# Altium PCB TK513_Limiter.PcbDoc
Units mm, origin at the board's own origin, x right, y up, seen from the top; angles counter-clockwise.
Board outline 77.5 x 82.75 mm, 4 copper layers (TopLayer, InternalPlane1, InternalPlane2, BottomLayer); 26 components, 31 nets, 107 pads, 320 vias.
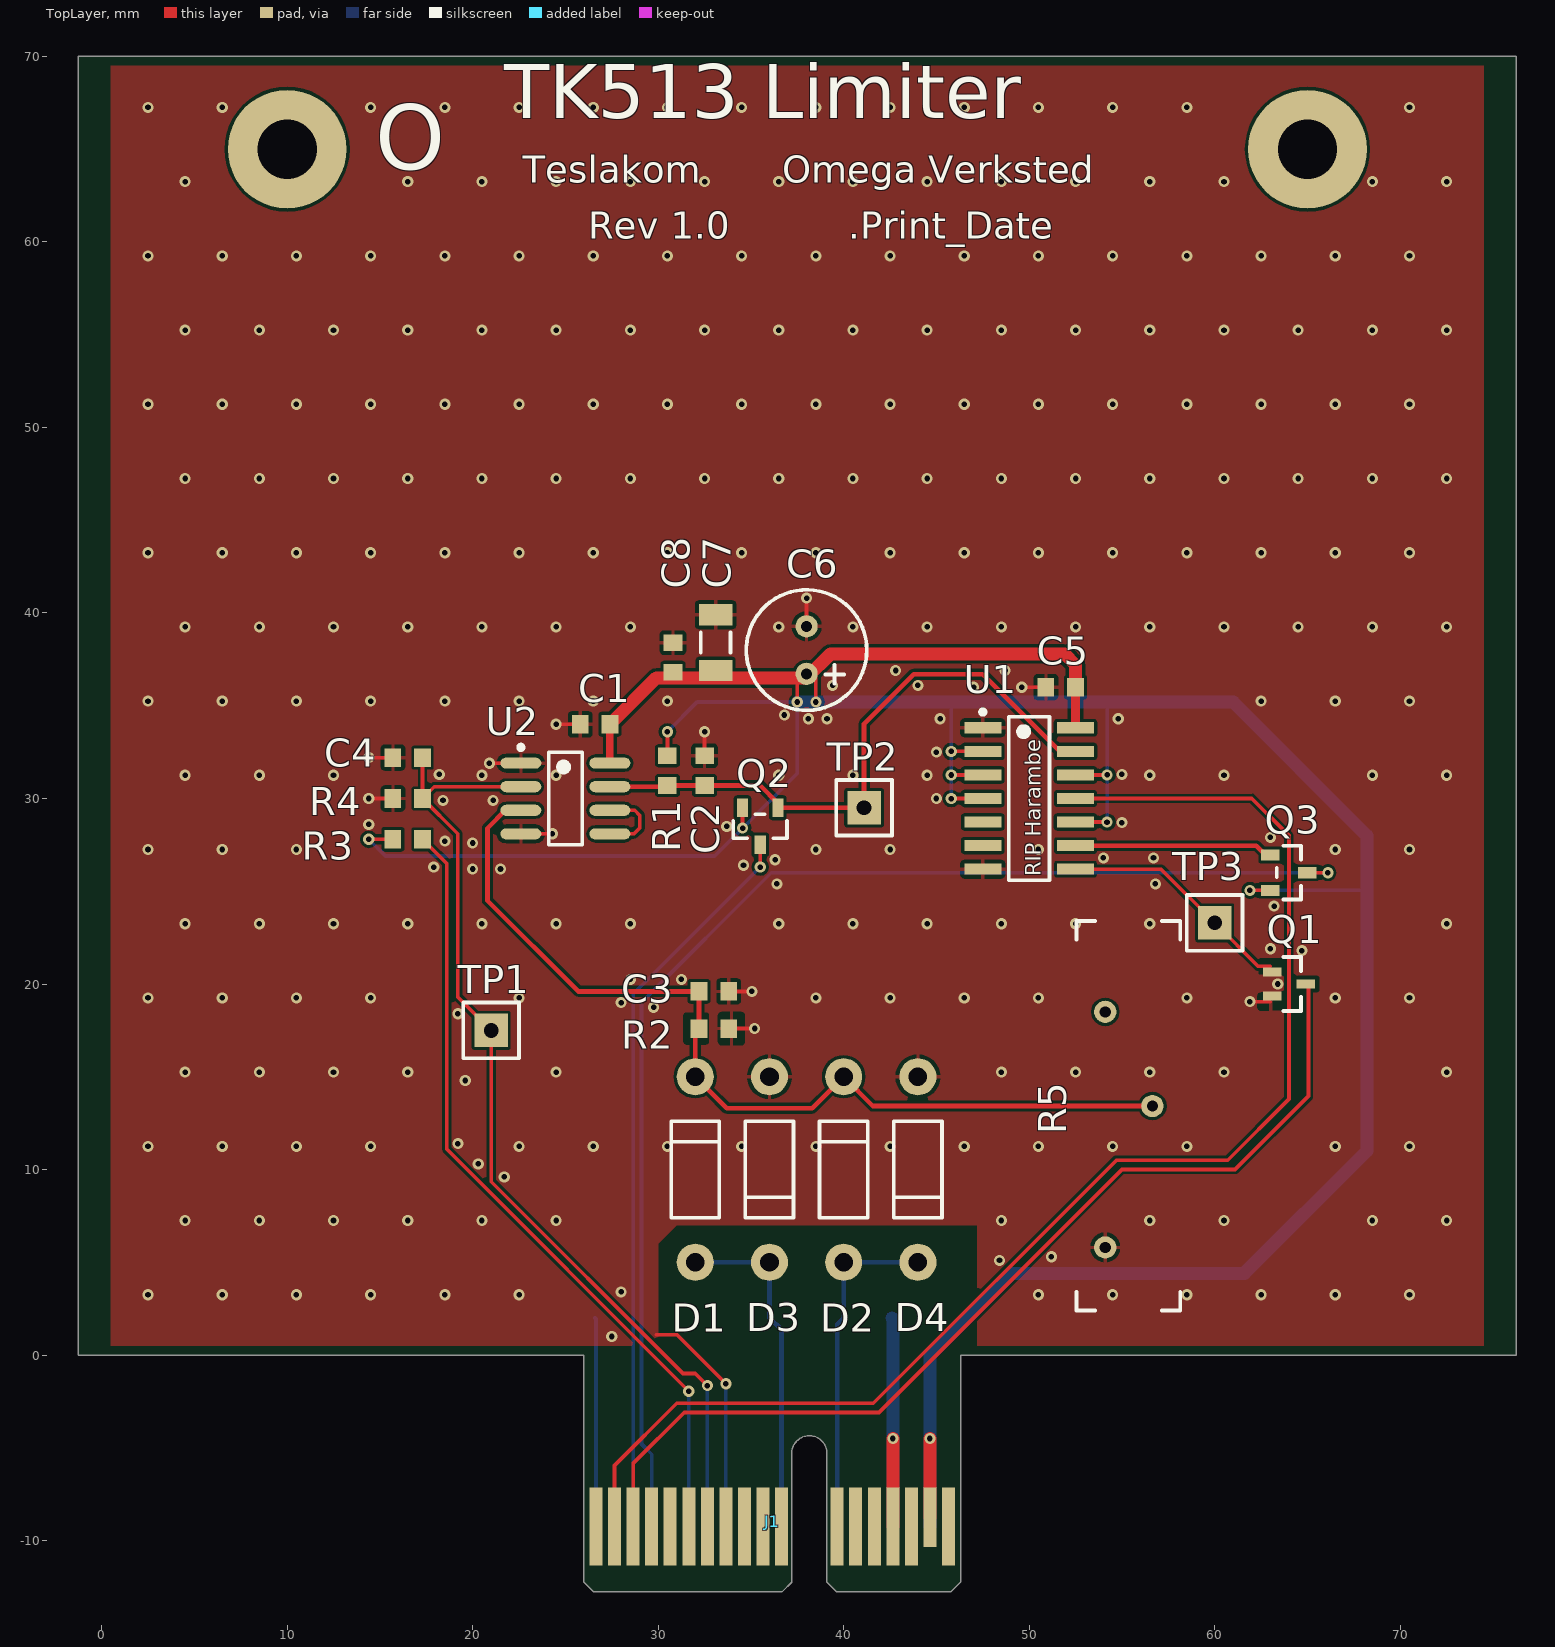
[diagram p0: TopLayer view]
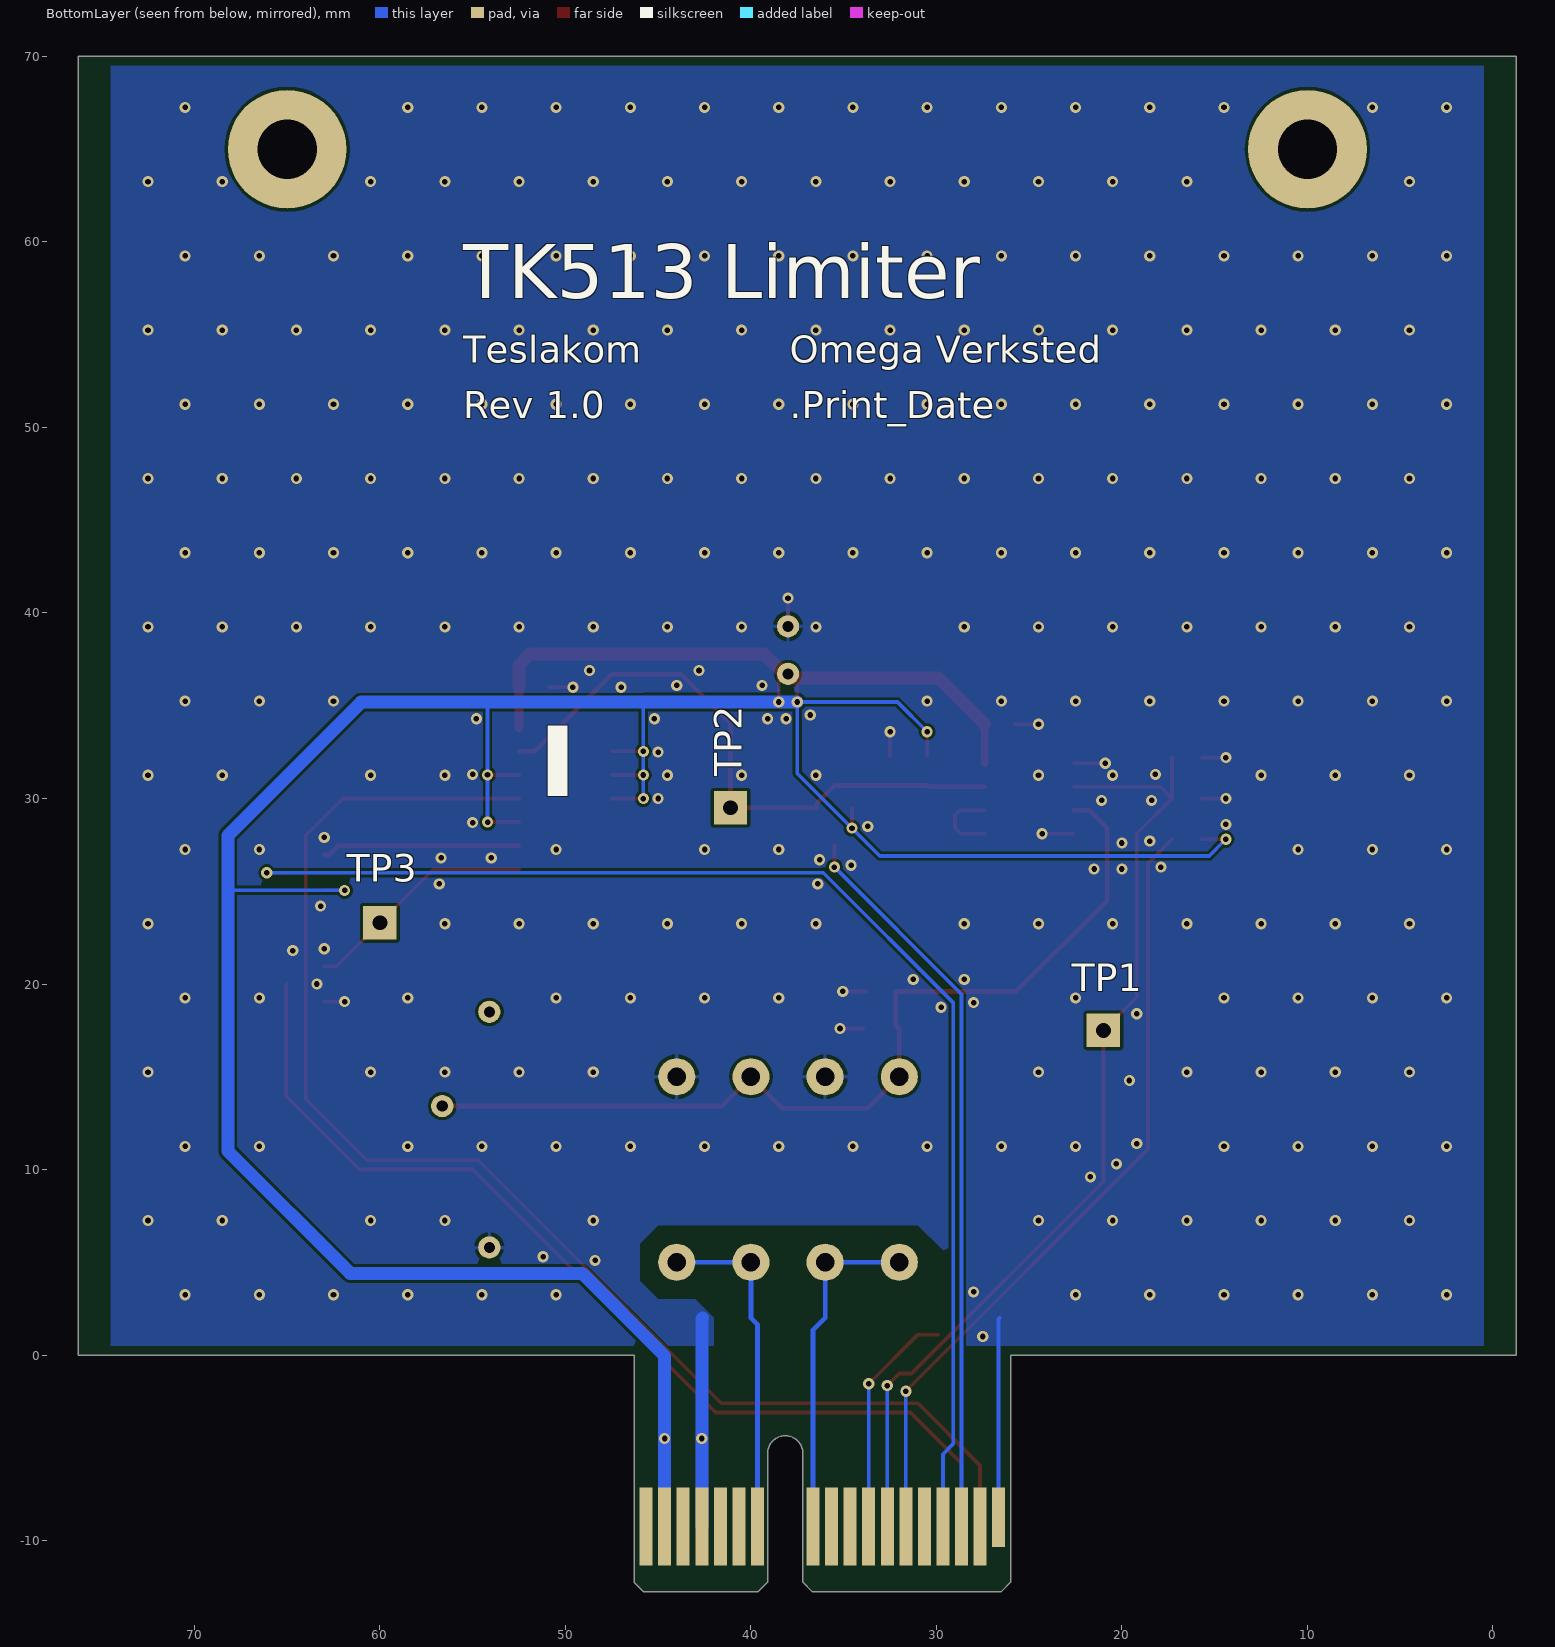
[diagram p1: BottomLayer view, seen from below]
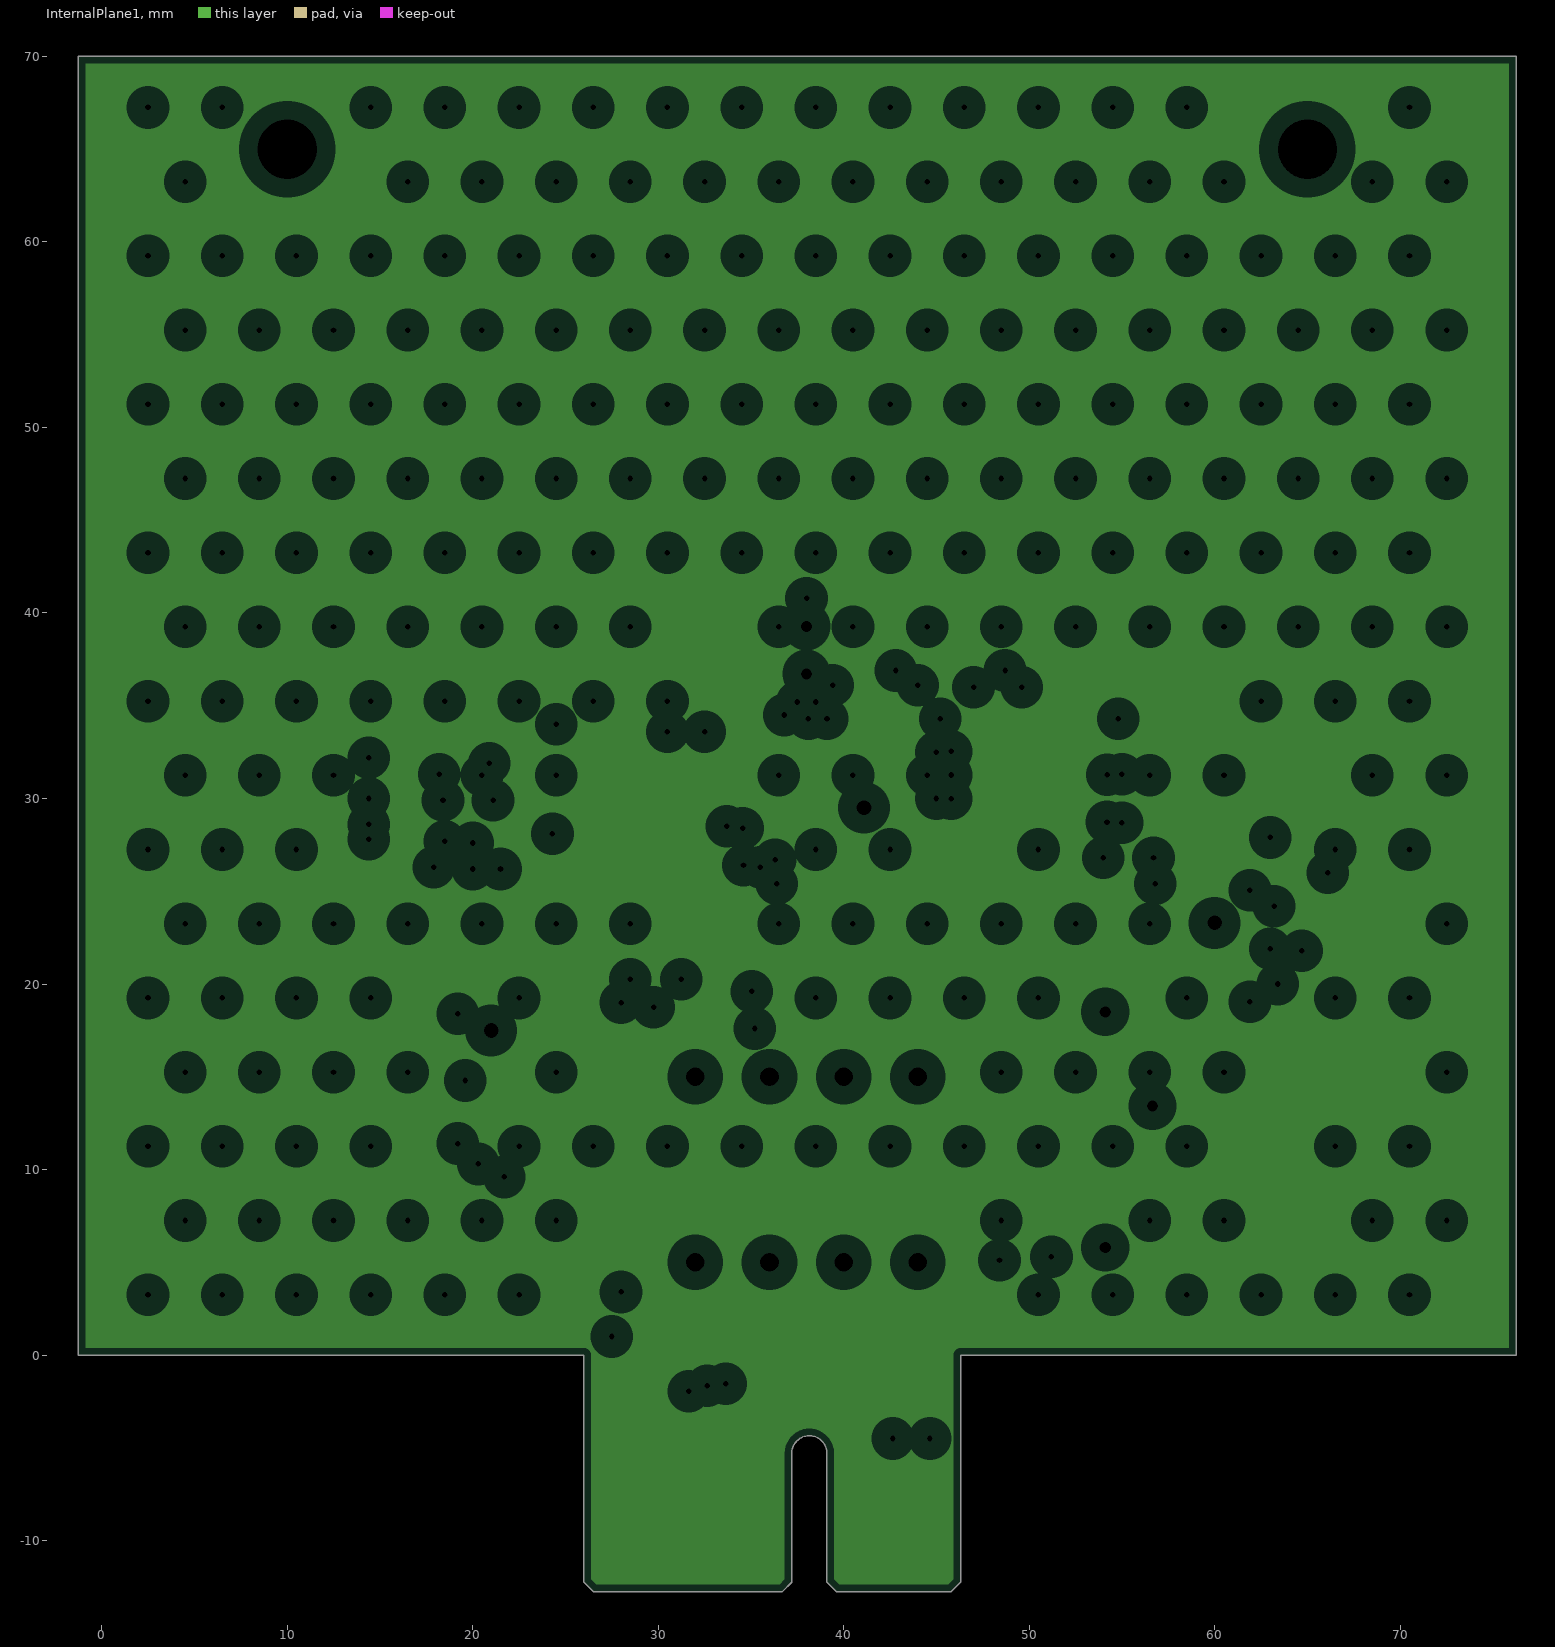
[diagram p2: InternalPlane1, clearances drawn from the general rule]
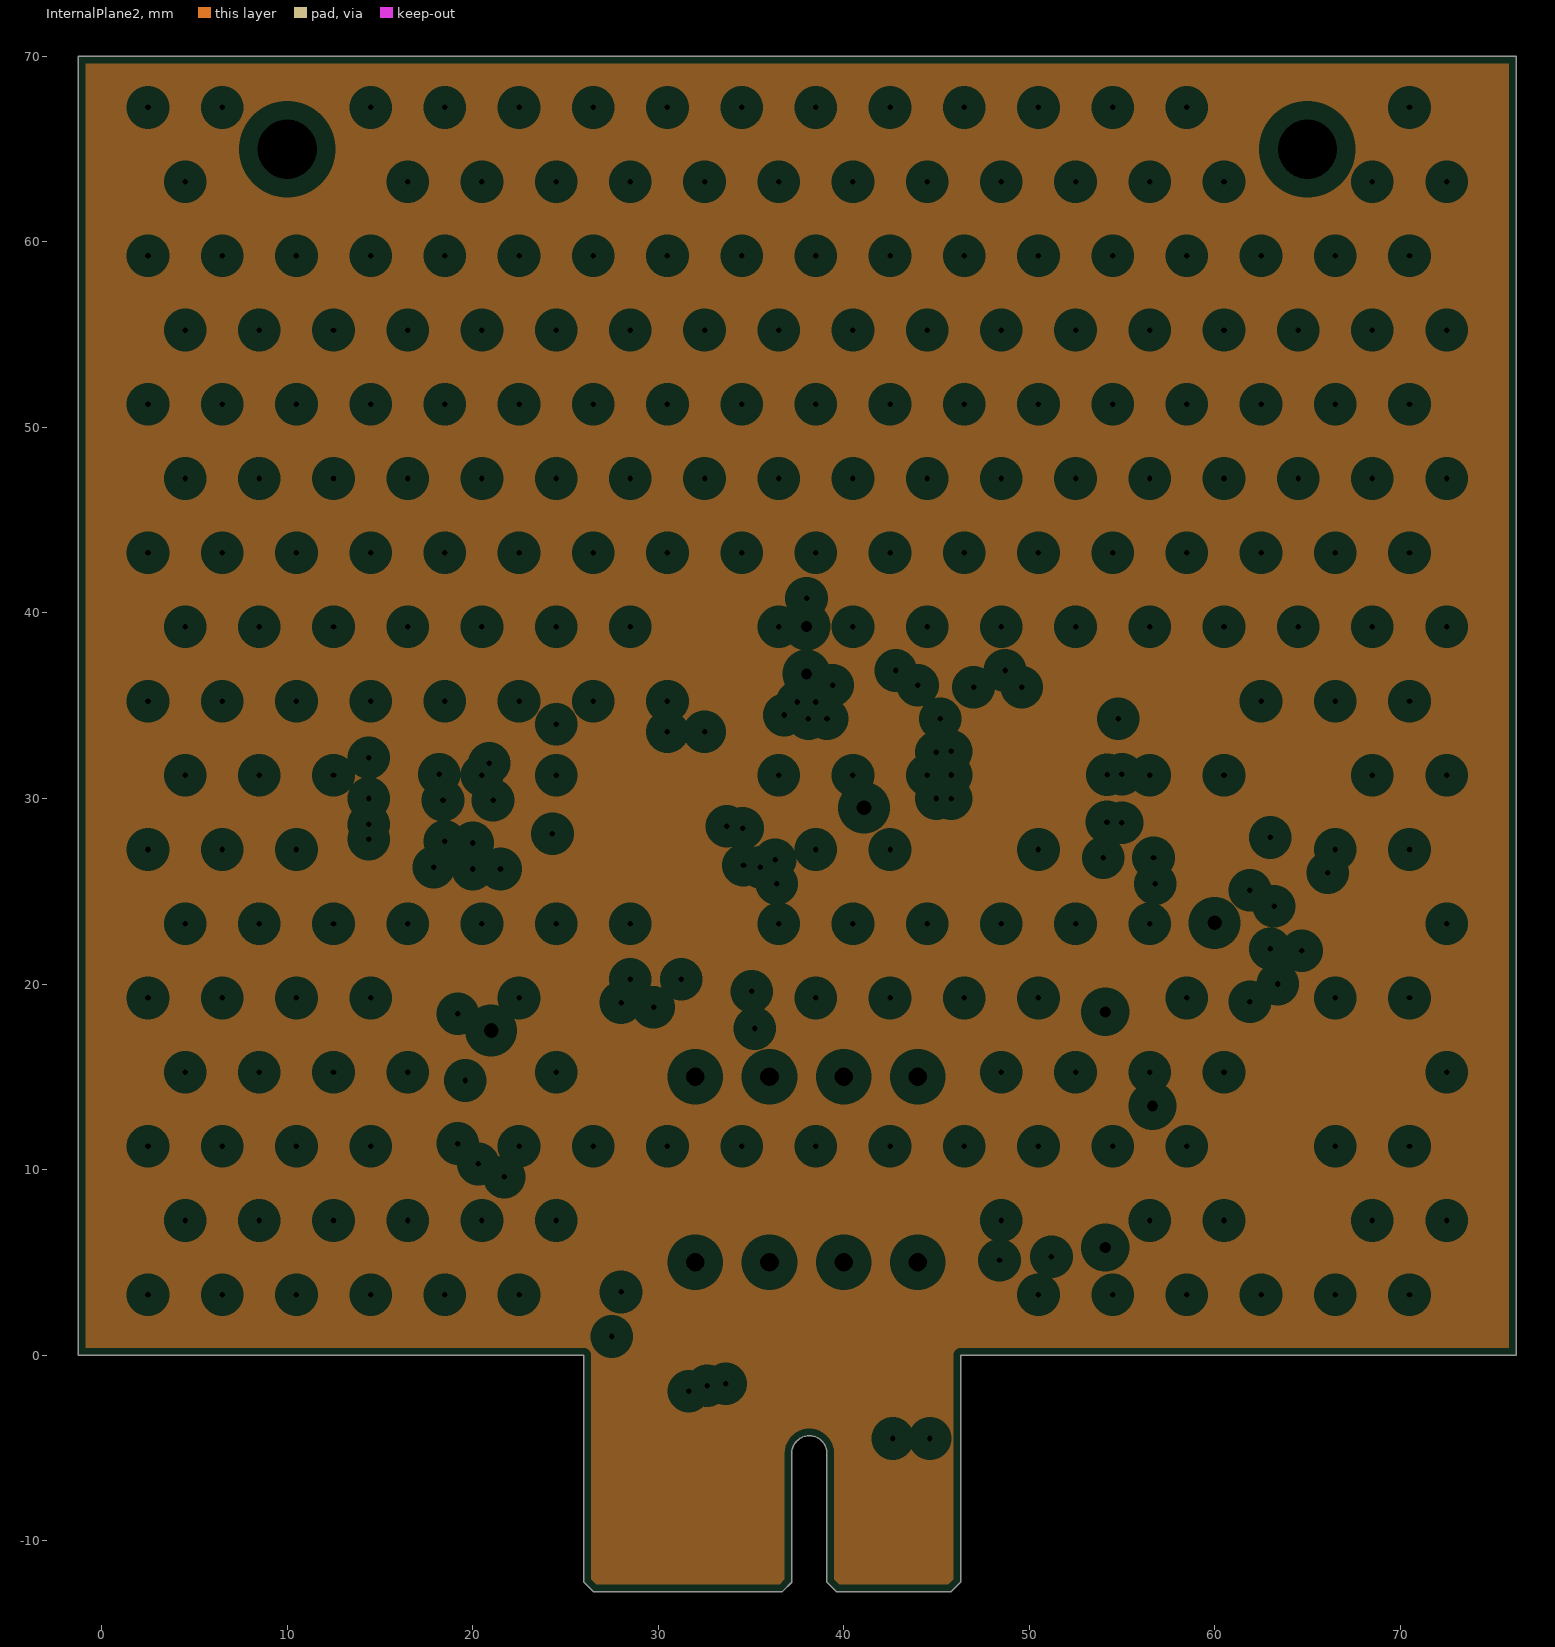
[diagram p3: InternalPlane2, clearances drawn from the general rule]

## Layer stack, top to bottom
TopSolder: solder mask 0.0102, Solder Resist, Dk 3.5
TopLayer: signal copper 0.0178
Dielectric1: core 0.32, FR-4, Dk 4.8
InternalPlane1: plane copper 0.0356
Dielectric2: prepreg 0.32, FR-4, Dk 4.8
InternalPlane2: plane copper 0.0356
Dielectric3: core 0.32, FR-4, Dk 4.8
BottomLayer: signal copper 0.0178
BottomSolder: solder mask 0.0102, Solder Resist, Dk 3.5

## Board outline
-1.25,0 14.35,0 26,0 26,-12.25 26.5,-12.75 36.7,-12.75 37.2,-12.25 37.2,-5.3 cw(c38.15,-5.3) 39.1,-5.3 39.1,-12.25 39.6,-12.75 45.8,-12.75 46.3,-12.25 46.3,0 76.25,0 76.25,70 -1.25,70

## Design rules (kind name [scope] priority, off if disabled: settings)
Clearance [All] p1: gap=0.16 ignorepadtopadclearanceinfootprint=FALSE except(0: Arc-Text Arc-Hole Track-Text Track-Hole SMDPad-Text SMDPad-Hole THPad-Text THPad-Hole Via-Text Via-Hole Fill-Text Fill-Hole Poly-Text Poly-Hole Region-Text Region-Hole Text-Text Text-Hole)
Height [All] p1: minheight=0 maxheight=200 prefheight=12.7
HoleSize [All] p1: absolutevalues=TRUE maxlimit=6.35 minlimit=0.3 maxpercent=80.000 minpercent=20.000
MinimumSolderMaskSliver [All] p1: minsoldermaskwidth=0.1
PlaneClearance [All] p1: clearance=1
PlaneConnect [All] p1: planeconnectstyle=Relief reliefexpansion=0.508 reliefentries=4 reliefconductorwidth=1 reliefairgap=0.254
PolygonConnect PolygonConnect_1 [IsVia] p1: connectstyle=Direct reliefconductorwidth=0.254 reliefentries=4 polygonreliefangle="90 Angle" airgapwidth=0.254
PolygonConnect [All] p2: connectstyle=Relief reliefconductorwidth=0.2 reliefentries=4 polygonreliefangle="90 Angle" airgapwidth=0.2
RoutingVias [All] p1: holewidth=0.3 width=0.6 viastyle="Through Hole" minholewidth=0.3 minwidth=0.6 maxholewidth=6.35 maxwidth=10
SilkToSolderMaskClearance [IsPad] p1: minsilkscreentomaskgap=0.178 clearancetoexposedcopper=TRUE
SolderMaskExpansion [All] p1: expansion=0.102 istentingtop=FALSE
Width [All] p1: maxlimit=10 minlimit=0.16 preferedwidth=0.4
24 further rules are at their usual default settings.

## Components (designator, comment, footprint, x,y, rotation, side; value= is the part's Value field where it differs from the comment)
C1 "100nF" CAPC0603(1608)55_N 26.6,34 r0 top
C2 "1nF" CAPC0603(1608)55_N 32.5,31.5 r270 top
C3 "1nF" CAPC0603(1608)55_N 33,19.6 r180 top
C4 "100nF" CAPC0603(1608)55_N 16.5,32.2 r0 top
C5 "100nF" CAPC0603(1608)55_N 51.7,36 r0 top
C6 "100uF" CAPPR25D06H11 38,38 r270 top
C7 "22uF" CAPC1206(3216)170_N 33.1,38.4 r270 top
C8 "100nF" CAPC0603(1608)55_N 30.8,37.6 r270 top
D1 "1N5819" DO-41 32,10 r90 top
D2 "1N5819" DO-41 40,10 r90 top
D3 "1N5819" DO-41 36,10 r270 top
D4 "1N5819" DO-41 44,10 r270 top
J1 "PCI_Express-36P" PCIeX1-GF-2D-1000-1K-O36 36.15,-9.25 r0 top
Q1 "2N7002" SOT323_N 64,20 r90 top
Q2 "BSH201" SOT23-3_N 35.5,28.5 r0 top
Q3 "BSH201" SOT23-3_N 64,26 r90 top
R1 "1k" RESC0603(1608)_N 30.5,31.5 r270 top
R2 "10R" RESC0603(1608)_N 33,17.6 r0 top
R3 "1k" RESC0603(1608)_N 16.5,27.8 r0 top
R4 "100k" RESC0603(1608)_N 16.5,30 r180 top
R5 "Trimmepot 100ohm" TRIMPOT_3006P 55.35,12.9 r90 top
TP1 "Header1x1" HDRV1W64P254_1X1_254X254X900B 21,17.5 r0 top
TP2 "Header1x1" HDRV1W64P254_1X1_254X254X900B 41.1,29.5 r0 top
TP3 "Header1x1" HDRV1W64P254_1X1_254X254X900B 60,23.3 r0 top
U1 "74HC74" SOIC-14 50,30 r0 top
U2 "LM311" SOIC-8-WIDE 25,30 r0 top

## Footprints (in the part's own frame and the unit in brackets; to place one, negate y for a bottom-side part, rotate by r counter-clockwise, add the part's x,y. Pads: shape width x height; smd on the part's side, far side on the other; paste and mask are expansions set on the pad)
CAPC0603(1608)55_N [mm] "Chip Capacitor, Body 1.6x0.8mm, Height 0.55mm, IPC Medium Density"
  rect 0.9x1 smd: 1(-0.8,0) 2(0.8,0)
  body extent -0.87,-0.48 0.88,0.47, height 0.55
CAPC1206(3216)170_N [mm] "Chip Capacitor, Body 3.2x1.6mm, Height 1.7mm, IPC Medium Density"
  rect 1.15x1.8 smd: 1(-1.5,0) 2(1.5,0)
  silkscreen extent -0.55,-0.8 0.55,0.8, body extent -1.7,-0.9 1.7,0.9, height 1.7
CAPPR25D06H11 [mm]
  round 1.2 hole 0.6: 1(-1.28,0) 2(1.28,0)
  silkscreen extent -3.25,-3.25 3.25,3.25, body extent -3.15,-3.15 3.15,3.15, height 11.5
DO-41 [mm]
  round 2 hole 1: 1(-5,0) 2(5,0)
  silkscreen extent -2.6,-1.3 2.6,1.3, body extent -5.51,-1.36 5.51,1.36, height 3.22
HDRV1W64P254_1X1_254X254X900B [mm] "Header 1x1"
  rect 1.8x1.8 hole 0.8: 1(0,0)
  silkscreen extent -1.5,-1.5 1.5,1.5
PCIeX1-GF-2D-1000-1K-O36 [mm] "Golden finger, PCIeX1, Dual, Opposite, Pitch 1mm, 36-Position"
  rect 0.7x3.2 smd far side paste-1: A1(-9.5,0.5)
  rect 0.7x4.2 smd far side paste-1: A2(-8.5,0) A3(-7.5,0) A4(-6.5,0) A5(-5.5,0) A6(-4.5,0) A7(-3.5,0) A8(-2.5,0) A9(-1.5,0) A10(-0.5,0) A11(0.5,0) A12(3.5,0) A13(4.5,0) A14(5.5,0) A15(6.5,0) A16(7.5,0) A17(8.5,0) A18(9.5,0)
  rect 0.7x4.2 smd paste-1: B1(-9.5,0) B2(-8.5,0) B3(-7.5,0) B4(-6.5,0) B5(-5.5,0) B6(-4.5,0) B7(-3.5,0) B8(-2.5,0) B9(-1.5,0) B10(-0.5,0) B11(0.5,0) B12(3.5,0) B13(4.5,0) B14(5.5,0) B15(6.5,0) B16(7.5,0) B18(9.5,0)
  rect 0.7x3.2 smd paste-1: B17(8.5,0.5)
RESC0603(1608)_N [mm] "Chip Resistor, Body 1.6x0.8mm, IPC Medium Density"
  rect 0.9x1 smd: 1(-0.8,0) 2(0.8,0)
  body extent -0.85,-0.47 0.85,0.47, height 0.6
SOIC-8-WIDE [mm] "SOIC, 8-Leads, Body 4.9x3.9mm, Pitch 1.27mm, IPC Medium Density"
  oval 2.2x0.6 smd: 1(-2.4,1.905) 2(-2.4,0.635) 3(-2.4,-0.635) 4(-2.4,-1.905) 5(2.4,-1.905) 6(2.4,-0.635) 7(2.4,0.635) 8(2.4,1.905)
  silkscreen extent -2.52,-2.5 0.9,2.88, body extent -3,-2.5 3.2,2.5, height 1.75
SOIC-14 [mm]
  rect 2x0.6 smd: 1(-2.5,3.81) 2(-2.5,2.54) 3(-2.5,1.27) 4(-2.5,0) 5(-2.5,-1.27) 6(-2.5,-2.54) 7(-2.5,-3.81) 8(2.5,-3.81) 9(2.5,-2.54) 10(2.5,-1.27) 11(2.5,0) 12(2.5,1.27) 13(2.5,2.54) 14(2.5,3.81)
  silkscreen extent -2.62,-4.4 1.1,4.78, body extent -3,-4.37 3,4.38, height 1.75
SOT23-3_N [mm] "SOT23, 3-Leads, Body 1.3x2.9mm, Pitch 0.95mm"
  rect 0.6x1 smd paste-0.05: 1(0.95,1) 2(-0.95,1) 3(0,-1)
  silkscreen extent -1.45,-0.65 1.45,0.65, body extent -1.45,-1.4 1.45,1.4, height 1.3
SOT323_N [mm] "SOT23, 3-Leads, Body 1.3x2.9mm, Pitch 0.95mm"
  rect 0.5x1 smd paste-0.05: 1(0.65,0.9) 2(-0.65,0.9) 3(0,-0.9)
  silkscreen extent -1.45,-0.65 1.45,0.3, body extent -1.45,-1.4 1.45,1.4, height 1.3
TRIMPOT_3006P [mm] "Bourns horizontal trimpot type 3006P"
  round 1.2 hole 0.6: 1(-7.1,1.25) 2(0.52,-1.29) 3(5.6,1.25)
  silkscreen extent -10.5,-2.8 10.5,2.8, body extent -10.15,-2.43 10.15,2.4, height 6.55

## Part data
C1 C4 C5 C8: library part 5152, "X7R 50V 5%", antall=1000, dybde=0, hylle=0, id=5152, komponenttype=2, lager_type=Baklager, leverandor=Farnell, leverandor_varenr=1759122, navn=100nF, nokkelord="Kondensator, Capacitor, CAP", pakke_opprettet="18/02/2015 14:18:13", pakke_opprettet_av=815, pakketype=0603, pris=1, produsent=Multicomp, rad=21, rom=OV, symbol_opprettet="14/11/2014 20:19:34", symbol_opprettet_av=815
C2 C3: library part 3687, "X7R 50V 5%", id=3687, komponenttype=2, leverandor=Farnell, leverandor_varenr=2310598, navn=1nF, nokkelord="Kondensator, Capacitor, CAP", pakke_opprettet="18/02/2015 14:18:13", pakke_opprettet_av=815, pakketype=0603, pris=1, produsent=Multicomp, symbol_opprettet="14/11/2014 20:19:34", symbol_opprettet_av=815
C6: library part 4858, "25V 2.5mm pitch", antall=38, dybde=1, hylle=4, id=4858, komponenttype=2, lager_type=Fremlager, leverandor=Farnell, leverandor_varenr=1848439, navn=100uF, nokkelord="Cap, Kondensator", pakke_opprettet="28/06/2014 17:35:52", pakke_opprettet_av=815, pakketype=CAPPR, pris=2, produsent=Panasonic, rad=7, rom=OV, symbol_opprettet="28/06/2014 15:26:13", symbol_opprettet_av=815
C7: library part 5192, "10V 10% Tantalum", id=5192, komponenttype=2, leverandor=Farnell, leverandor_varenr=1457420, navn=22uF, nokkelord="Capacitor Cap Kondis", pakke_opprettet="11/02/2015 13:21:22", pakke_opprettet_av=815, pakketype=1206, pris=3, produsent=Kemet, symbol_opprettet="14/11/2014 20:19:34", symbol_opprettet_av=815
D1 D2 D3 D4: library part 5238, "Schottkydiode, 1A, 40V", antall=25, dybde=0, hylle=2, id=5238, komponenttype=9, lager_type=Fremlager, leverandor=Farnell, leverandor_varenr=7429304, navn=1N5819, nokkelord="schottky, diode", pakke_opprettet="28/06/2014 16:50:18", pakke_opprettet_av=815, pakketype=DO, pris=2, produsent=Multicomp, rad=0, rom=OV, symbol_opprettet="28/06/2014 15:20:09", symbol_opprettet_av=815
J1: library part 3037, "PCI express PCB kortkankonnektor", id=3037, komponenttype=11, navn=PCIeX1-GF-2D-1000-1K-O36, pakke_opprettet="07/06/2015 17:49:10", pakke_opprettet_av=815, pakketype=-, pris=0, produsent="PCB feature", symbol_opprettet="06/07/2014 17:26:37", symbol_opprettet_av=815
Q1: library part 3075, "N-Channel MOSFET 300mA", antall=810, dybde=0, hylle=3, id=3075, komponenttype=4, lager_type=Fremlager, leverandor=Farnell, leverandor_varenr=1829184, navn=2N7002, pakke_opprettet="12/05/2018 20:42:12", pakke_opprettet_av=1165, pakketype=SOT-323, pris=1, produsent=Nexperia, rad=2, rom=OV, symbol_opprettet="11/07/2014 23:17:04", symbol_opprettet_av=774
Q2 Q3: library part 3085, "P-Channel MOSFET 300mA", antall=51, dybde=0, hylle=3, id=3085, komponenttype=4, lager_type=Fremlager, leverandor=Farnell, leverandor_varenr=1758073, navn=BSH201, pakke_opprettet="08/07/2014 20:37:25", pakke_opprettet_av=815, pakketype=SOT, pris=3, produsent="NXP Semiconductors", rad=3, rom=OV, Status=New, symbol_opprettet="14/09/2016 17:47:57", symbol_opprettet_av=1150
R1 R3: library part 5339, "0.1W 1% Thick film resistor", id=5339, komponenttype=1, leverandor=Farnell, leverandor_varenr=2447272, navn=1k, nokkelord="Resistor Motstand", pakke_opprettet="08/07/2014 21:15:30", pakke_opprettet_av=815, pakketype=0603, pris=0, produsent=Multicomp, symbol_opprettet="08/07/2014 21:16:33", symbol_opprettet_av=815
R2: library part 5657, "0.1W 1% Thick film resistor", antall=180, dybde=0, hylle=2, id=5657, komponenttype=1, lager_type=Baklager, leverandor=Farnell, leverandor_varenr=2447233, navn=10R, pakke_opprettet="08/07/2014 21:15:30", pakke_opprettet_av=815, pakketype=0603, pris=0, produsent=Multicomp, rad=0, rom=OV, symbol_opprettet="08/07/2014 21:16:33", symbol_opprettet_av=815
R4: library part 3778, "0.1W 1% Thick film resistor", antall=0, dybde=96, hylle=2, id=3778, komponenttype=1, lager_type=Fremlager, leverandor=Farnell, leverandor_varenr=2447226, navn=100k, nokkelord=Resistor, pakke_opprettet="08/07/2014 21:15:30", pakke_opprettet_av=815, pakketype=0603, pris=0, produsent=Multicomp, rad=-1, rom=OV, symbol_opprettet="08/07/2014 21:16:33", symbol_opprettet_av=815
R5: library part 3823, "15 turn, horizontal", antall=54, dybde=0, hylle=3, id=3823, komponenttype=1, lager_type=Fremlager, leverandor=Farnell, leverandor_varenr=9352279, navn="Trimmepot 100ohm", nokkelord=trimpot, pakke_opprettet="10/02/2017 15:29:47", pakke_opprettet_av=815, pakketype=TH, pris=15, produsent=Bourns, rad=1, rom=OV, symbol_opprettet="03/11/2016 15:34:07", symbol_opprettet_av=815
TP1 TP2 TP3: library part 5093, "2,54mm pitch", id=5093, komponenttype=11, navn="Header 1x1", pakke_opprettet="13/11/2014 12:30:32", pakke_opprettet_av=815, pakketype=TH, pris=1, symbol_opprettet="13/11/2014 10:58:46", symbol_opprettet_av=815
U1: library part 3211, "Dual D flip flop", id=3211, komponenttype=8, leverandor=Farnell, leverandor_varenr=9591680, navn=74HC74, nokkelord=Logikk, pakke_opprettet="28/06/2014 18:13:44", pakke_opprettet_av=815, pakketype=SOIC, pris=4, produsent="Texas Instruments", symbol_opprettet="28/06/2014 15:25:05", symbol_opprettet_av=815
U2: library part 3241, "Comparator, High Speed", id=3241, leverandor=Farnell, leverandor_varenr=2293183, navn=LM311, pakke_opprettet="28/06/2014 18:39:37", pakke_opprettet_av=815, pakketype=SOIC, pris=2, produsent="Texas Instruments", symbol_opprettet="16/01/2017 15:59:36", symbol_opprettet_av=815

## Free pads (board coordinates)
  round 6.4 hole 3.2 unplated: 0(10,65) 0(65,65)

## Via types
v1: diameter 0.6, hole 0.3, TopLayer to BottomLayer, tented both sides, 320 vias

## Nets (pads, with @x,y where several pads share a name; then routed paths per layer and width w, separated by ;. In a path a pad name is that pad's centre, name@x,y a point inside that pad or via, vN(x,y) a via of type N, cw(c..) or ccw(c..) an arc to the next point about the centre after c; other vN are vias at no path point)
AUX1_A: D1.1 D3.2 J1.A11 | length 18.5
  BottomLayer w0.254: D1.1 D3.2 36,2 36.65,1.35 J1.A11
AUX1_B: D2.1 D4.2 J1.A12 | length 18.4
  BottomLayer w0.254: J1.A12 39.65,1.65 40,2 D2.1 D4.2
AUX2_A: J1.A13
AUX2_B: J1.A14
B5: J1.B5
B6: J1.B6
B7: J1.B7
B8: J1.B8
B9: J1.B9
B10: J1.B10
B11: J1.B11
B12: J1.B12
B13: J1.B13
B14: J1.B14
DC_IN: C3.2 D1.2 D2.2 R2.1 R5.2 U2.3 | length 50.9
  TopLayer w0.254: U2.3 21.765,29.365 20.8,28.4 20.8,24.5 25.7,19.6 C3.2 32.2,17.75 32.05,17.6 32,17.55 D1.2 33.7,13.3 38.3,13.3 D2.2 41.58,13.42 R5.2
FP_1: J1.A6 R3.2 | length 43
  TopLayer w0.2: R3.2 18.6,26.5 18.6,11.1 v1(31.65,-1.95)
  BottomLayer w0.2: J1.A6 v1(31.65,-1.95)
FP_2: C4.2 J1.A7 R4.1 TP1.1 U2.2 | length 53.8
  TopLayer w0.2: C4.2 R4.1 ; U2.2 17.935,30.635 R4.1 ; v1(32.65,-1.65) 32,-1 31.342,-1 21,9.342 TP1.1 19.2,19.3 19.2,28.1 R4.1
  BottomLayer w0.2: J1.A7 v1(32.65,-1.65)
FP_4: J1.A9
FP_5: J1.A10
GND: C1.1 C2.1 C3.1 C4.1 C5.1 C6.1 C7.1 C8.1 D3.1 D4.1 J1.A1 J1.A8 J1.A15 J1.B15 Q1.2 R2.2 R4.2 R5.1 U1.1 U1.7 U2.1 U2.4 | length 53.5
  TopLayer w0.2: v1@14.5,30 R4.2 ; v1@14.5,32.2 C4.1 ; v1(20.9,31.9) 20.905,31.905 U2.1 ; U2.4 24.295,28.095 v1(24.3,28.1) ; v1@24.6,34 C1.1 ; 29.9,1.1 31,1.1 v1(33.65,-1.55) ; C2.1 v1@32.5,33.5 ; C3.1 v1(35.05,19.6) ; R2.2@33.95,17.6 v1(35.2,17.6) ; C6.1@38,39.5 v1@38,40.7 ; v1@49.7,36 C5.1 ; v1(61.9,19.05) 63,19.05
  TopLayer w0.7: J1.B15 v1(42.65,-4.5)
  BottomLayer w0.2: 26.6,2 26.65,1.95 J1.A1 ; J1.A8 v1(33.65,-1.55)
  BottomLayer w0.7: 42.6,2 42.65,1.95 v1(42.65,-4.5) J1.A15
  other v1: 27.5,1 2.5,3.25 6.5,3.25 10.5,3.25 14.5,3.25 18.5,3.25 22.5,3.25 50.5,3.25 54.5,3.25 58.5,3.25 62.5,3.25 66.5,3.25 70.5,3.25 28,3.4 48.4,5.1 51.2,5.3 4.5,7.25 8.5,7.25 12.5,7.25 16.5,7.25 20.5,7.25 24.5,7.25 48.5,7.25 56.5,7.25 60.5,7.25 68.5,7.25 72.5,7.25 21.7,9.6 20.3,10.3 2.5,11.25 6.5,11.25 10.5,11.25 14.5,11.25 22.5,11.25 26.5,11.25 30.5,11.25 34.5,11.25 38.5,11.25 42.5,11.25 46.5,11.25 50.5,11.25 54.5,11.25 58.5,11.25 66.5,11.25 70.5,11.25 19.2,11.4 19.6,14.8 4.5,15.25 8.5,15.25 12.5,15.25 16.5,15.25 24.5,15.25 48.5,15.25 52.5,15.25 56.5,15.25 60.5,15.25 72.5,15.25 19.2,18.4 29.75,18.75 28,19 2.5,19.25 6.5,19.25 10.5,19.25 14.5,19.25 22.5,19.25 38.5,19.25 42.5,19.25 46.5,19.25 50.5,19.25 58.5,19.25 66.5,19.25 70.5,19.25 63.4,20 28.5,20.25 31.25,20.25 64.7,21.8 63,21.9 4.5,23.25 8.5,23.25 12.5,23.25 16.5,23.25 20.5,23.25 24.5,23.25 28.5,23.25 36.5,23.25 40.5,23.25 44.5,23.25 48.5,23.25 52.5,23.25 56.5,23.25 72.5,23.25 63.2,24.2 36.4,25.4 56.8,25.4 20,26.2 21.5,26.2 17.9,26.3 34.6,26.4 36.3,26.7 54,26.8 56.7,26.8 2.5,27.25 6.5,27.25 10.5,27.25 38.5,27.25 42.5,27.25 50.5,27.25 66.5,27.25 70.5,27.25 20,27.6 18.5,27.7 63,27.9 33.7,28.5 14.4,28.6 55,28.7 18.4,29.9 21.1,29.9 14.4,30 45,30 4.5,31.25 8.5,31.25 12.5,31.25 20.5,31.25 24.5,31.25 36.5,31.25 40.5,31.25 44.5,31.25 56.5,31.25 60.5,31.25 68.5,31.25 72.5,31.25 18.2,31.3 55,31.3 14.4,32.2 45,32.5 32.5,33.6 24.5,34 38.1,34.3 39.1,34.3 45.2,34.3 54.8,34.3 36.8,34.5 2.5,35.25 6.5,35.25 10.5,35.25 14.5,35.25 18.5,35.25 22.5,35.25 26.5,35.25 30.5,35.25 62.5,35.25 66.5,35.25 70.5,35.25 47,36 49.6,36 39.4,36.1 44,36.1 42.8,36.9 48.7,36.9 4.5,39.25 8.5,39.25 12.5,39.25 16.5,39.25 20.5,39.25 24.5,39.25 28.5,39.25 36.5,39.25 40.5,39.25 44.5,39.25 48.5,39.25 52.5,39.25 56.5,39.25 60.5,39.25 64.5,39.25 68.5,39.25 72.5,39.25 38,40.8 2.5,43.25 6.5,43.25 10.5,43.25 14.5,43.25 18.5,43.25 22.5,43.25 26.5,43.25 30.5,43.25 34.5,43.25 38.5,43.25 42.5,43.25 46.5,43.25 50.5,43.25 54.5,43.25 58.5,43.25 62.5,43.25 66.5,43.25 70.5,43.25 4.5,47.25 8.5,47.25 12.5,47.25 16.5,47.25 20.5,47.25 24.5,47.25 28.5,47.25 32.5,47.25 36.5,47.25 40.5,47.25 44.5,47.25 48.5,47.25 52.5,47.25 56.5,47.25 60.5,47.25 64.5,47.25 68.5,47.25 72.5,47.25 2.5,51.25 6.5,51.25 10.5,51.25 14.5,51.25 18.5,51.25 22.5,51.25 26.5,51.25 30.5,51.25 34.5,51.25 38.5,51.25 42.5,51.25 46.5,51.25 50.5,51.25 54.5,51.25 58.5,51.25 62.5,51.25 66.5,51.25 70.5,51.25 4.5,55.25 8.5,55.25 12.5,55.25 16.5,55.25 20.5,55.25 24.5,55.25 28.5,55.25 32.5,55.25 36.5,55.25 40.5,55.25 44.5,55.25 48.5,55.25 52.5,55.25 56.5,55.25 60.5,55.25 64.5,55.25 68.5,55.25 72.5,55.25 2.5,59.25 6.5,59.25 10.5,59.25 14.5,59.25 18.5,59.25 22.5,59.25 26.5,59.25 30.5,59.25 34.5,59.25 38.5,59.25 42.5,59.25 46.5,59.25 50.5,59.25 54.5,59.25 58.5,59.25 62.5,59.25 66.5,59.25 70.5,59.25 4.5,63.25 16.5,63.25 20.5,63.25 24.5,63.25 28.5,63.25 32.5,63.25 36.5,63.25 40.5,63.25 44.5,63.25 48.5,63.25 52.5,63.25 56.5,63.25 60.5,63.25 68.5,63.25 72.5,63.25 2.5,67.25 6.5,67.25 14.5,67.25 18.5,67.25 22.5,67.25 26.5,67.25 30.5,67.25 34.5,67.25 38.5,67.25 42.5,67.25 46.5,67.25 50.5,67.25 54.5,67.25 58.5,67.25 70.5,67.25
INTERRUPT: J1.A4 Q3.3 | length 69.5
  TopLayer w0.2: Q3.3 v1(66.1,26)
  BottomLayer w0.2: J1.A4 29.65,-5.35 29.1,-4.8 29.1,19 36.1,26 v1(66.1,26)
INTERRUPT_BUS: J1.B4
KORT_INNSATT_BUS: J1.B1
LIMIT_BUS: J1.B3 Q1.3 | length 54.1
  TopLayer w0.2: J1.B3 28.65,-5.85 31.4,-3.1 41.9,-3.1 55,10 61.1,10 65.06,13.96 65.06,19.94 Q1.3@65,20
NetC2_2: C2.2 Q2.1 R1.2 TP2.1 U1.13 U2.7 | length 32.9
  TopLayer w0.254: U2.7 30.435,30.635 R1.2 C2.2 35.5,30.7 Q2.1@36.45,29.75 ; Q2.1 TP2.1 41.1,34.03 43.77,36.7 47.5,36.7 51.66,32.54 U1.13
NetQ1_1: Q1.1 TP3.1 U1.8 | length 12.7
  TopLayer w0.2: U1.8 57.11,26.19 TP3.1 62.35,20.95 63,20.95
NetQ3_1: Q3.1 U1.9 | length 10.7
  TopLayer w0.254: U1.9 62.24,27.46 62.75,26.95 Q3.1
NetU2_5: U2.5 U2.6 | length 4.1
  TopLayer w0.2: U2.5 28.695,28.095 29,28.4 29,29.1 28.735,29.365 U2.6
STATUS: J1.A3 Q2.3 | length 39.6
  TopLayer w0.2: v1(35.5,26.3) Q2.3
  BottomLayer w0.2: J1.A3 28.65,19.45 v1(35.5,26.3)
TRIGGER_BUS: J1.B2 U1.11 | length 74.4
  TopLayer w0.2: J1.B2 27.65,-5.95 31,-2.6 41.6,-2.6 54.7,10.5 60.7,10.5 64,13.8 64,28 62,30 U1.11
VCC_P5V0: C1.2 C5.2 C6.2 C7.2 C8.2 J1.A17 J1.B17 Q2.2 Q3.2 R1.1 R3.1 U1.2 U1.3 U1.4 U1.10 U1.12 U1.14 U2.8 | length 195
  TopLayer w0.2: v1@14.5,27.8 R3.1 ; R1.1 v1@30.5,33.5 ; v1(34.55,28.4) Q2.2 ; v1@37.5,35.31 37.5,36.5 C6.2@37.5,36.51 ; v1@38.5,35.31 C6.2@38.5,36.51 ; v1(45.8,29.995) 45.805,30 U1.4 ; v1(45.8,31.265) 45.805,31.27 U1.3 ; v1(45.8,32.535) 45.805,32.54 U1.2 ; U1.10 v1(54.195,28.73) ; U1.12 54.195,31.27 v1(54.2,31.275) ; v1(61.9,25.05) Q3.2
  TopLayer w0.4: U2.8 C1.2
  TopLayer w0.5: U1.14 C5.2
  TopLayer w0.7: C1.2 29.9,36.5 37.5,36.5 38,36.5 39.3,37.8 51.9,37.8 52.5,37.2 C5.2 ; J1.B17 v1(44.65,-4.5)
  BottomLayer w0.2: v1(14.4,27.8) 15.3,26.9 33.05,26.9 v1(34.55,28.4) 37.5,31.35 v1(37.5,35.2) 32.1,35.2 v1(30.5,33.6) ; v1(45.8,29.995) v1(45.8,31.265) v1(45.8,32.535) 45.8,35.19 ; v1@54.2,28.735 v1(54.2,31.275) 54.2,35.19 ; v1(61.9,25.05) 68.15,25.05 68.2,25.1
  BottomLayer w0.7: v1@37.51,35.2 v1(38.5,35.2) ; v1@38.51,35.19 v1(38.5,35.2) ; J1.A17 v1(44.65,-4.5) 44.65,-0.05 49.1,4.4 61.6,4.4 68.2,11 68.2,25.1 68.2,28 61.01,35.19 54.2,35.19 45.8,35.19 v1(38.5,35.2)
pads on no net: J1.A2 J1.A5 J1.A16 J1.A18 J1.B16 J1.B18 R5.3 U1.5 U1.6

## Polygon pours and split planes (outlines as drawn)
GND on BottomLayer "Bottom Layer GND" (solid, remove dead copper, pour order 2): 0.5,69.5 74.5,69.5 74.5,0.5 0.5,0.5
GND on TopLayer "Top Layer GND" (solid, remove dead copper, pour order 0): 0.5,69.5 74.5,69.5 74.5,0.5 0.5,0.5
no net on InternalPlane2 (split plane): 75.867,0.383 46.3,0.383 46.225,0.376 46.154,0.354 46.087,0.318 46.029,0.271 45.982,0.213 45.946,0.147 45.925,0.075 45.917,0 45.917,-12.091 45.641,-12.367 39.759,-12.367 39.483,-12.091 39.483,-5.3 39.475,-5.151 39.45,-5.003 39.408,-4.86 39.351,-4.722 39.279,-4.591 39.192,-4.469 39.093,-4.357 38.981,-4.258 38.859,-4.171 38.728,-4.099 38.59,-4.042 38.447,-4 38.299,-3.975 38.15,-3.967 38.001,-3.975 37.853,-4 37.71,-4.042 37.572,-4.099 37.441,-4.171 37.319,-4.258 37.207,-4.357 37.108,-4.469 37.021,-4.591 36.949,-4.722 36.892,-4.86 36.85,-5.003 36.825,-5.151 36.817,-5.3 36.817,-12.091 36.541,-12.367 26.659,-12.367 26.383,-12.091 26.383,0 26.375,0.075 26.354,0.147 26.318,0.213 26.271,0.271 26.213,0.318 26.146,0.354 26.075,0.375 26,0.383 14.35,0.383 -0.867,0.383 -0.867,69.617 75.867,69.617
no net on InternalPlane1 (split plane): 75.867,0.383 46.3,0.383 46.225,0.376 46.154,0.354 46.087,0.318 46.029,0.271 45.982,0.213 45.946,0.147 45.925,0.075 45.917,0 45.917,-12.091 45.641,-12.367 39.759,-12.367 39.483,-12.091 39.483,-5.3 39.475,-5.151 39.45,-5.003 39.408,-4.86 39.351,-4.722 39.279,-4.591 39.192,-4.469 39.093,-4.357 38.981,-4.258 38.859,-4.171 38.728,-4.099 38.59,-4.042 38.447,-4 38.299,-3.975 38.15,-3.967 38.001,-3.975 37.853,-4 37.71,-4.042 37.572,-4.099 37.441,-4.171 37.319,-4.258 37.207,-4.357 37.108,-4.469 37.021,-4.591 36.949,-4.722 36.892,-4.86 36.85,-5.003 36.825,-5.151 36.817,-5.3 36.817,-12.091 36.541,-12.367 26.659,-12.367 26.383,-12.091 26.383,0 26.375,0.075 26.354,0.147 26.318,0.213 26.271,0.271 26.213,0.318 26.146,0.354 26.075,0.375 26,0.383 14.35,0.383 -0.867,0.383 -0.867,69.617 75.867,69.617

## Other copper
TopLayer:
  pour cut-out: 47.2,7 47.2,5.9 47.2,0 30,0 30,4 30,6 31,7
BottomLayer:
  pour cut-out: 45,7 46,6 46,4 45,3 43,3 42,2 42,0 29.3,0 29.3,5.3 31,7

## Silkscreen, mask and mechanical layers (free items; w line width, h text height)
TopOverlay:
  text "TK513 Limiter" at 21.7,65.7 h5
  text "O" at 14.75,62.75 h6
  text "Teslakom" at 22.7,62.7 h2.5
  text "Omega Verksted" at 36.7,62.7 h2.5
  text "Rev 1.0" at 26.24,59.7 h2.5
  text ".Print_Date" at 40.24,59.7 h2.5
  text "RIP Harambe" at 50.9,25.8 h1.4 r90
BottomOverlay:
  text "TK513 Limiter" at 55.5,56 h5
  text "Omega Verksted" at 37.9,53 h2.5
  text "Teslakom" at 55.5,53 h2.5
  text ".Print_Date" at 37.9,50 h2.5
  text "Rev 1.0" at 55.5,50 h2.5
  text "TP2" at 40.5,31.2 h1.5 r270
  text "TP3" at 61.8,25.5 h1.5
  text "T" at 53.7,23.5 h35
  text "TP1" at 22.7,19.6 h1.5
PCI-SIG Outline:
  the board outline again, w0.1